# Altium PCB PCB.PcbDoc
Units mil, origin at the board's own origin, x right, y up, seen from the top; angles counter-clockwise.
Board outline 4840 x 4500 mil, 2 copper layers (Top Layer, Bottom Layer); 41 components, 31 nets, 177 pads, 0 vias.
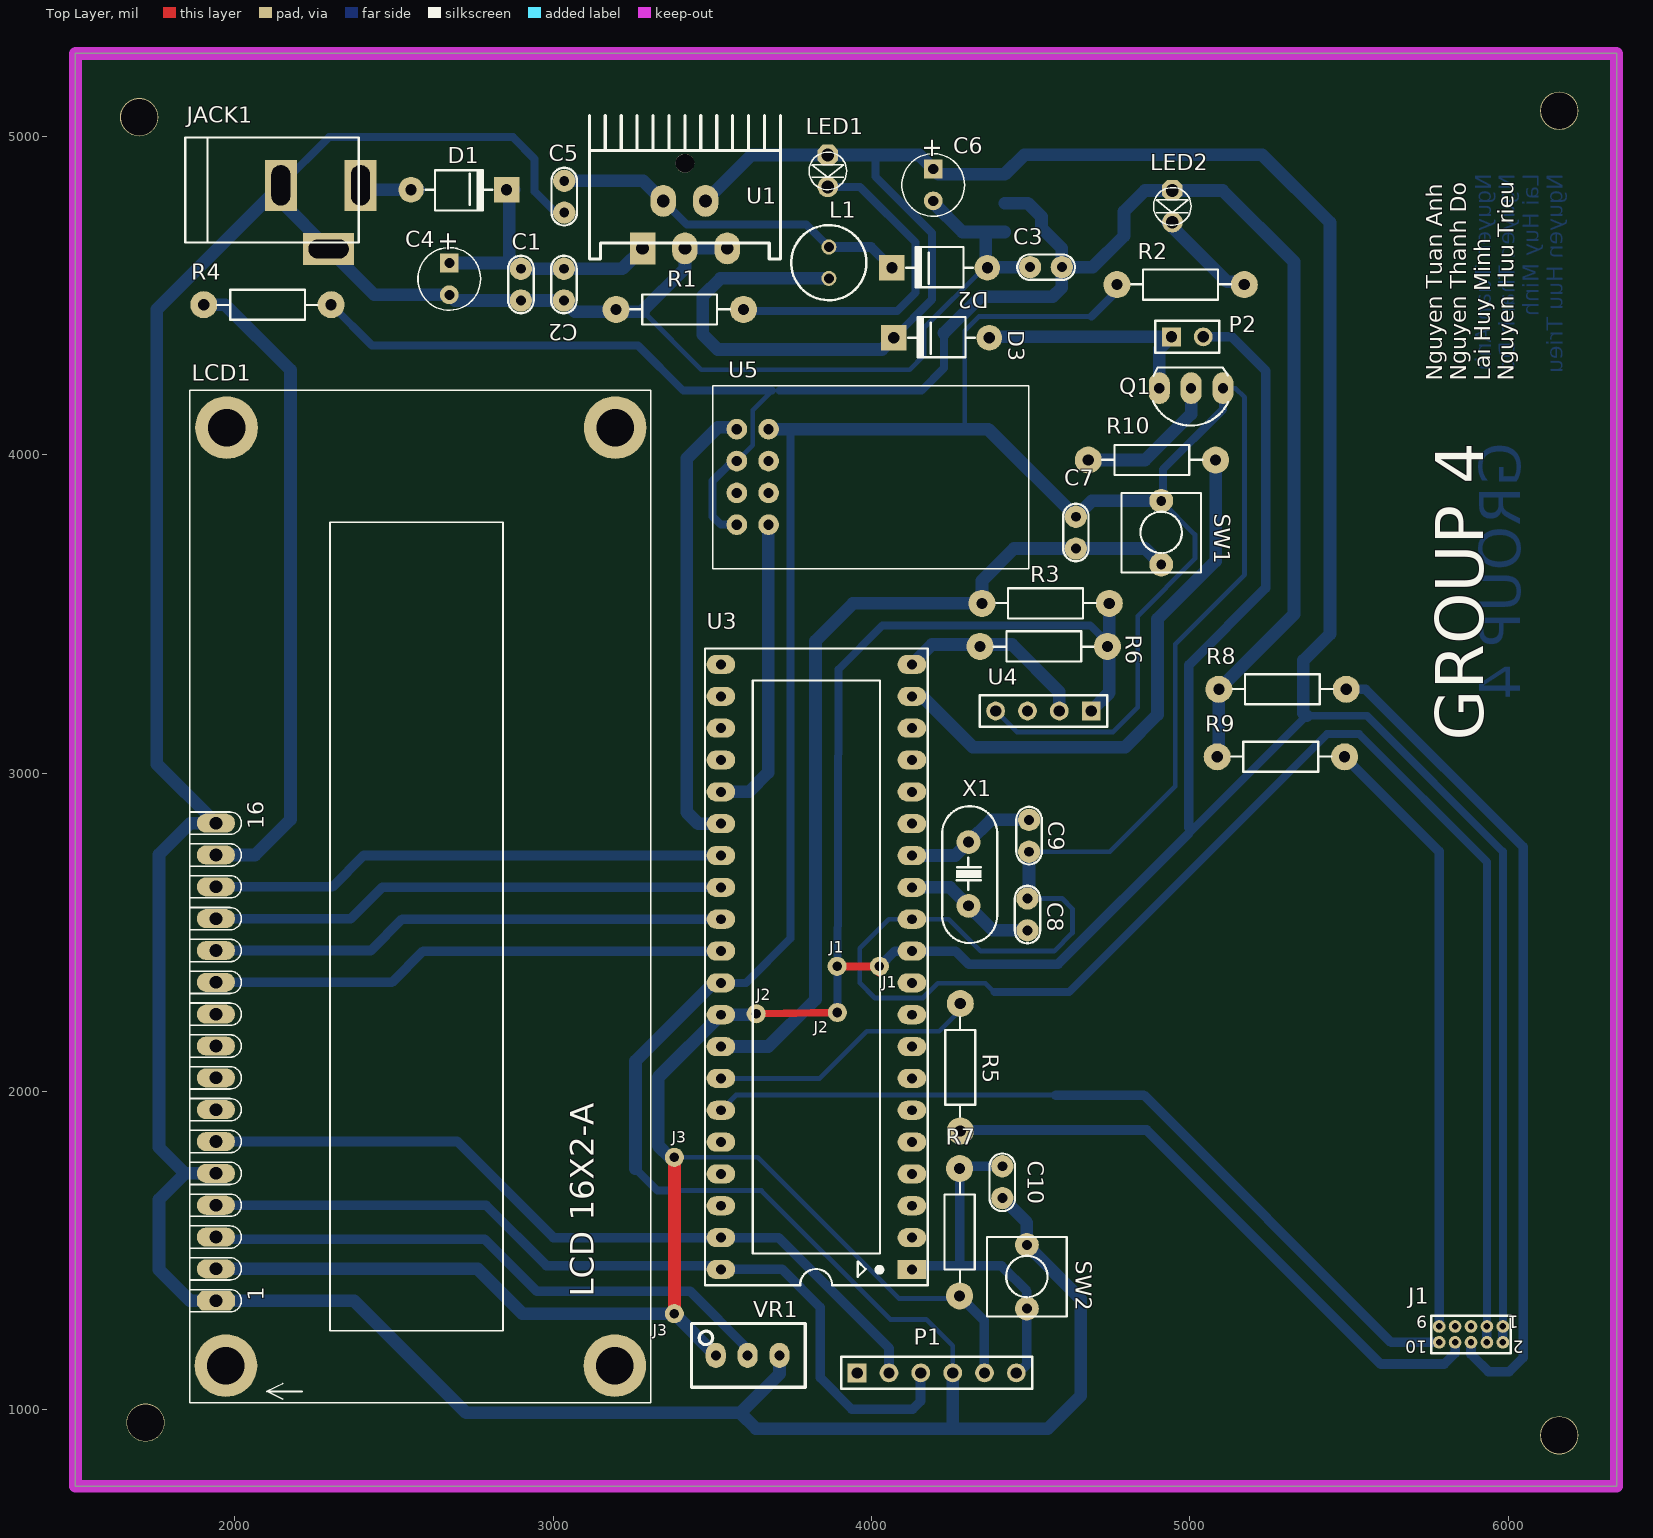
[diagram p0: Top Layer view]
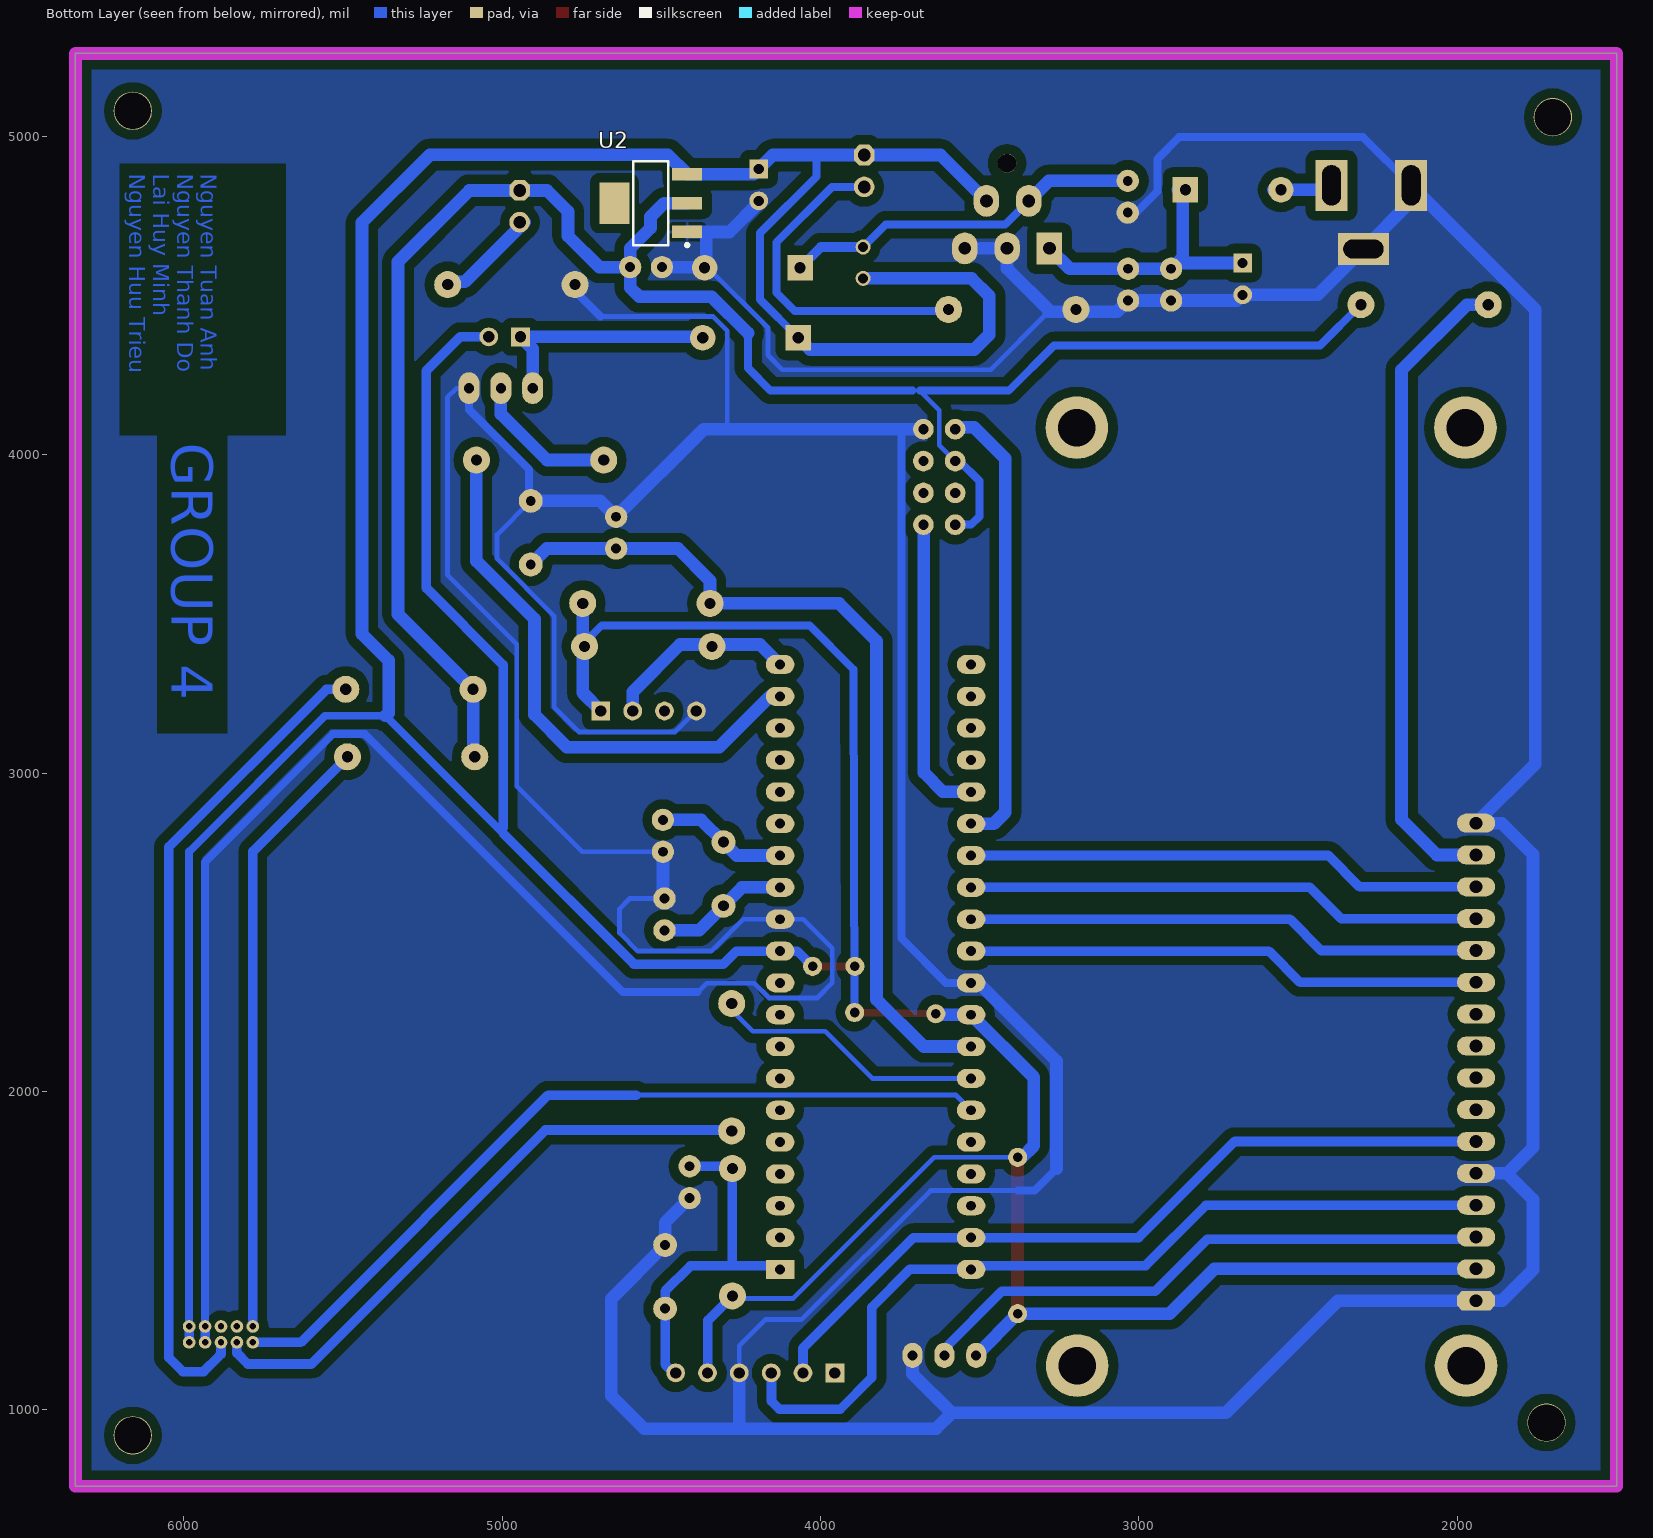
[diagram p1: Bottom Layer view, seen from below]

## Layer stack, top to bottom
Top Solder: solder mask 0.4, Solder Resist, Dk 3.5
Top Layer: signal copper 1.4
Dielectric 1: dielectric 12.6, FR-4, Dk 4.8
Bottom Layer: signal copper 1.4
Bottom Solder: solder mask 0.4, Solder Resist, Dk 3.5

## Board outline
1500,760 6340,760 6340,5260 1500,5260

## Design rules (kind name [scope] priority, off if disabled: settings)
Clearance Clearance_5 [InNamedPolygon('GND')] p1: gap=30 ignorepadtopadclearanceinfootprint=FALSE
Clearance Clearance_4 [InNamedPolygon('GND')] p2: gap=25 ignorepadtopadclearanceinfootprint=FALSE
Clearance Clearance_3 [InNamedPolygon('GND')] p3: gap=10 ignorepadtopadclearanceinfootprint=FALSE except(0: Arc-Hole Track-Hole SMDPad-Hole THPad-Hole Via-Hole Fill-Hole Poly-Hole Region-Hole Text-Hole)
Clearance Clearance_2 [InNamedPolygon('GND')] p4: gap=20 ignorepadtopadclearanceinfootprint=FALSE
Clearance Clearance_1 [InNamedPolygon('GND')] p5: gap=10 ignorepadtopadclearanceinfootprint=FALSE except(0: Arc-Hole Track-Hole SMDPad-Hole THPad-Hole Via-Hole Fill-Hole Poly-Hole Region-Hole Text-Hole)
Clearance [All] p6: gap=10 ignorepadtopadclearanceinfootprint=FALSE
ComponentClearance [All] p1: gap=20 collisioncheckmode=3 verticalgap=20 showdistances=FALSE
PolygonConnect PolygonConnect_1 [All vs IsNamedPolygon('GND')] p1: thpad.connectstyle=Direct thpad.reliefconductorwidth=10 thpad.reliefentries=4 thpad.polygonreliefangle="90 Angle" thpad.airgapwidth=10 smdpad.connectstyle=Relief smdpad.reliefconductorwidth=10 smdpad.reliefentries=4 smdpad.polygonreliefangle="90 Angle" smdpad.airgapwidth=10 via.connectstyle=Relief via.reliefconductorwidth=10 via.reliefentries=4 via.polygonreliefangle="90 Angle" via.airgapwidth=10
PolygonConnect [All] p2: connectstyle=Relief reliefconductorwidth=10 reliefentries=4 polygonreliefangle="90 Angle" airgapwidth=10
RoutingVias [All] p1: holewidth=28 width=50 viastyle="Through Hole" minholewidth=28 minwidth=50 maxholewidth=28 maxwidth=50
SolderMaskExpansion [All] p1: expansion=4
Width [All] p1: maxlimit=40 minlimit=15 preferedwidth=25
29 further rules are at their usual default settings.

## Components (designator, comment, footprint, x,y, rotation, side; value= is the part's Value field where it differs from the comment)
C1 "105" CN1 2899,4484 r90 top value=100pF
C2 "104" CN1 3034,4484 r90 top value=100pF
C3 "100uF" CN1 4498,4589 r0 top value=100pF
C4 "470uF" CA-ALU-5L 2674,4552 r270 top value=104
C5 "105" CN1 3035,4760 r90 top value=100pF
C6 "330uF" CA-ALU-5L 4194,4847 r270 top value=104
C7 "100pF" CN1 4642,3705 r90 top
C8 "20pF" CN1 4490,2606 r270 top value=100pF
C9 "20pF" CN1 4495,2753 r90 top value=100pF
C10 "100pF" CN1 4411,1765 r270 top
D1 "Diode" DIO-1A-SMALL 2504,4832 r180 top value=1N5007
D2 "FR207" DIO-1A-SMALL 4414,4587 r0 top value=1N5007
D3 "Diode" DIO-1A-SMALL 4420,4367 r0 top value=1N5007
J1 "PM 2.5" 62201021821 5883,1237 r180 top
JACK1 "JACK DC" "JACK DC" 2270,4746 r0 top value="Jac DC"
L1 "200uF" L-DIP-M-5.3 3866,4603 r270 top value="150 mH"
LCD1 "LCD 16x2" "LCD 16x2-A" 1941.05,1342.74 r90 top locked
LED1 "LED" LED-3MM-YELLOW 3863,4941 r270 top value="LED 3 ly Single Colour"
LED2 "LED" LED-3MM-YELLOW 4945,4830 r270 top value="LED 3 ly Single Colour"
P1 "Header 6" HDR1X6 3955,1116 r0 top
P2 "Header 2H" HDR1X2 4942,4370 r0 top
Q1 "2N222" TO92-123 5004,4208.84 r180 top value=C1815
R1 "330R" RES-1/4W 3383,4461 r180 top
R2 "100R" RES-1/4W 4956,4539 r180 top
R3 "10k" RES-1/4W 4532,3538 r180 top
R4 "100R" RES-1/4W 2118,4466 r0 top
R5 "1k" RES-1/4W 4274,2061 r270 top
R6 "4.7k" RES-1/4W 4556,3393 r0 top
R7 "10k" RES-1/4W 4282,1573 r90 top
R8 "1k" RES-1/4W 5276,3268 r180 top
R9 "1k" RES-1/4W 5271,3056 r180 top
R10 "10k" RES-1/4W 4866,3988 r180 top
SW1 "SW" SW2 4910,3855 r270 top value="SW chip 2 pin"
SW2 "SW" SW2 4488,1518 r270 top value="SW chip 2 pin"
U1 "LM2576" DIP5-T 3413,4815 r0 top
U2 "LM1117-3.3V" SOT223 4533,4790 r90 bottom
U3 "PIC16F887-PU" DIP40/W0.6 4127,1441 r90 top locked
U4 "DHT11" DHT11 4690,3195 r180 top
U5 "ESP-01" ESP8266 3634,3932.01 r90 top locked
VR1 "10K" RVAR 3611,1171 r0 top value="VR 10K"
X1 "20MHz" XT2 4305,2683 r270 top value=4Mhz

## Footprints (in the part's own frame and the unit in brackets; to place one, negate y for a bottom-side part, rotate by r counter-clockwise, add the part's x,y. Pads: shape width x height; smd on the part's side, far side on the other; paste and mask are expansions set on the pad)
62201021821 [mil] "Socket Header, Pitch 1.27 mm, THT, Vertical, dual row, 10p"
  round 40 hole 20: 1(-100,-25) 2(-100,25) 3(-50,-25) 4(-50,25) 5(0,-25) 6(0,25) 7(50,-25) 8(50,25) 9(100,-25) 10(100,25)
  silkscreen extent -125,-59 125,59, body extent -133,-59 133,59, height 179
CA-ALU-5L [mm] "Polarized capacitors, Aluminum Electrolytic Capacitors, 2-Leads, Body 5x11x2x0.5"
  rect 1.5x1.5 hole 0.8: 1(-1.27,0)
  round 1.5 hole 0.8: 2(1.27,0)
  silkscreen extent -2.5,-2.5 2.5,2.5, body extent -2.54,-2.54 2.54,2.54, height 13.9
CN1 [mil]
  round 70 hole 31: 1(0,0) 2(100,0)
  silkscreen extent -40,-40 141,40, body extent -60,-30 170,37, height 265
DHT11 [mm]
  rect 1.5x1.5 hole 0.9: 1(0,0)
  round 1.5 hole 0.9: 2(2.54,0) 3(5.08,0) 4(7.62,0)
  silkscreen extent -1.27,-1.27 8.89,1.27, body extent -2.19,-2.83 9.81,2.67, height 23.25
DIO-1A-SMALL [mil] "Diode 1A, W 100mil, L 350mil"
  round 80 hole 35: 1(-50,0)
  rect 80x80 hole 35: 2(-350,0)
  silkscreen extent -305,-61 -95,65, body extent -366,-61 -34,65, height 122
DIP5-T [mil]
  rect 80x100 hole 40: 1(-132,-167.09)
  oval 80x100 hole 40: 2(-67,-18) 3(1,-167) 4(66,-18) 5(134,-167)
  round 59.06 hole 59.06: ""(1,100)
  silkscreen extent -299,-200 301,250, body extent -199,-175 201,150, height 859
DIP40/W0.6 [mil] "40 PIN, W 600mil, Pin to pin 100mil"
  rect 60x90 hole 31: 1(0,0)
  oval 60x90 hole 31: 2(100,0) 3(200,0) 4(300,0) 5(400,0) 6(500,0) 7(600,0) 8(700,0) 9(800,0) 10(900,0) 11(1000,0) 12(1100,0) 13(1200,0) 14(1300,0) 15(1400,0) 16(1500,0) 17(1600,0) 18(1700,0) 19(1800,0) 20(1900,0) 21(1900,600) 22(1800,600) 23(1700,600) 24(1600,600) 25(1500,600) 26(1400,600) 27(1300,600) 28(1200,600) 29(1100,600) 30(1000,600) 31(900,600) 32(800,600) 33(700,600) 34(600,600) 35(500,600) 36(400,600) 37(300,600) 38(200,600) 39(100,600) 40(0,600)
  silkscreen extent -50,-50 1950,650, body extent -82,-10 1982,600, height 224
ESP8266 [mil]
  round 65 hole 32: 1(148,57) 2(48,57) 3(-52,57) 4(-152,57) 5(-152,-43) 6(-52,-43) 7(48,-43) 8(148,-43)
  silkscreen extent -290,-860 285,132, body extent -290,-858 281,118, height 566
HDR1X2 [mm] "Connector; Header; 2 Position"
  rect 1.5x1.5 hole 0.9: 1(0,0)
  round 1.5 hole 0.9: 2(2.54,0)
  silkscreen extent -1.27,-1.27 3.81,1.27, body extent -1.27,-1.27 3.81,1.27, height 7
HDR1X6 [mm] "Connector; Header; 6 Position"
  rect 1.5x1.5 hole 0.9: 1(0,0)
  round 1.5 hole 0.9: 2(2.54,0) 3(5.08,0) 4(7.62,0) 5(10.16,0) 6(12.7,0)
  silkscreen extent -1.27,-1.27 13.97,1.27, body extent -1.27,-1.27 13.97,1.27, height 7
"JACK DC" [mil] "Jac DC input"
  rect 100x160 hole 59.06 slot 125.98 at 90 deg: 1(125,100) 2(-125,100)
  rect 160x100 hole 59.06 slot 125.98 at 0 deg: 3(25,-100)
  silkscreen extent -425,-80 120,250, body extent -410,-105 134,269, height 434
L-DIP-M-5.3 [mm] "THT Inductor, 2-Leads, Body 5.3  mm"
  round 1.2 hole 0.8: 1(-1.25,0) 2(1.25,0)
  silkscreen extent -3,-3 3,3, body extent -2.44,-2.44 2.44,2.45, height 7.6
"LCD 16x2-A" [mil] "Pantalla LCD 16 caracteres x 2 Lineas, conexion superior"
  round 196.85 hole 118.11: 0(-203.74,-1252.95) 0(-203.74,-31.5) 0(2742.13,-33.46) 0(2742.13,-1253.94)
  oct 60x120 hole 40: 1(0,0)
  oval 60x120 hole 40: 2(100,0) 3(200,0) 4(300,0) 5(400,0) 6(500,0) 7(600,0) 8(700,0) 9(800,0) 10(900,0) 11(1000,0) 12(1100,0) 13(1200,0) 14(1300,0) 15(1400,0) 16(1500,0)
  silkscreen extent -320,-1365 2859,82, body extent -315,-1357 2854,80, height 753
LED-3MM-YELLOW [mil]
  oct 65x65 hole 40: 1(0,0)
  round 65 hole 40: 2(100,0)
  silkscreen extent -9,-59 109,59, body extent -27,-77 117,80, height 181
RES-1/4W [mil]
  round 85 hole 35: 1(-215,5) 2(185,5)
  silkscreen extent -173,-42 141,52, body extent -227,-42 197,52, height 95
RVAR [mm] "Bien tro vi chinh"
  oval 1.6x2 hole 0.8: 1(-2.54,0) 2(0,0) 3(2.54,0)
  silkscreen extent -4.47,-2.54 4.6,2.54, body extent -4.54,-2.4 4.66,2.4, height 12.02
SOT223 [mm]
  rect 1x2.4 smd: 1(-2.3,-2.9) 2(0,-2.9) 3(2.3,-2.9)
  rect 3.3x2.4 smd: 4(0,2.9)
  silkscreen extent -3.47,-3.02 3.35,1.4, body extent -3.25,-3.56 3.25,3.4, height 1.68
SW2 [mil] "SW button 2pin, 250x 250 mil"
  round 75 hole 31: 1(0,0) 2(200,0)
  silkscreen extent -25,-125 225,125, body extent -18,-116 218,128, height 197
TO92-123 [mil] "TO-92"
  oval 66x100 hole 32: 1(-100,0) 2(0,0) 3(100,0)
  silkscreen extent -117,-65 120,118, body extent -109,-66 109,95, height 245
XT2 [mil] "Footpin for Crystal 2 pin"
  round 75 hole 34: 1(-100,0) 2(100,0)
  silkscreen extent -213,-83 217,90, body extent -216,-87 216,90, height 144

## Part data
C1 C2 C3 C5 C7 C8 C9 C10: library part CAP, "Cap np  1pF - 472pF"
C4 C6: library part CN-ALU-DIP, "Capacitor (Semiconductor SIM Model)", LatestRevisionDate=17-Jul-2002, LatestRevisionNote="Re-released for DXP Platform.", PackageReference=C1206, Publisher="Altium Limited"
D1 D3: "Default Diode", Code - JEDEC=DO-214-AB, Published=8-Jun-2000, Publisher="Altium Limited", Revision="July-2002: Re-released for DXP Platform."
D2: library part Diode, "Default Diode", Code - JEDEC=DO-214-AB, Published=8-Jun-2000, Publisher="Altium Limited", Revision="July-2002: Re-released for DXP Platform."
J1: library part 62201021821, "Socket Header WR-PHD, Pitch 1.27 mm, THT, Vertical, dual row, 10 pin", Contact Resistance="20 mOhm", Insulation Resistance=">1000 MOhm", Operating Temperature="-40 to 105 degC", Rated Current="1 A", Working Voltage="100 VAC", ComponentLink1Description=Manufacturer, ComponentLink1URL=http://www.we-online.de, ComponentLink2Description=Datasheet, ComponentLink2URL=http://katalog.we-online.com/em/datasheet/62201021821.pdf, Mounting Technology=THT, Orientation=Vertical, Part Number=62201021821, Pin Number=10, Pitch="1.27 mm", Published Date="Jan. 2018", Publisher="Wurth Elektronik", Row Number=dual
L1: library part L-DIP-1, "Inductor"
LED1 LED2: "LED Single colour Green and Red"
Q1: "NPN 600mW, ECB", =C2383
R1 R2 R3 R4 R5 R6 R7 R8 R9 R10: library part Res, "Res", Manufacturer="Generic Components", Class=Passive, Published=08/06/2000, Publisher="Altium Hobart Technology Centre", SubClass=R
SW1 SW2: library part SW2, "Switch button 2 pin"
U1: Max Input Voltage="12 V", Max Output Current="3 (6.0 peak) A", Max Output Voltage=mV, Temperature Range="-40 to +125 degC", Category=IC-Power, Min Input Voltage=mV, Min Output Voltage=mV, Mounting Technology="Surface Mount", Status=Unreleased, Supply Voltage=mV
U2: library part LM1117, "800mA Low-Dropout Linear Regulator", Creator="Nguyen Ba Bien", Website=http://group3i.net
U3: "Flash-Based, 8-Bit CMOS Microcontroller with nanoWatt Technology, 8K (x14-Bit words) Program Memory, 624 Bytes Data Memory, 35 I/O pins, 40-Pin PDIP, Standard VDD Range, Extended Temperature", Supplier Part Number 1=PIC16F887-E/P-ND, ComponentLink1Description=Datasheet, ComponentLink1URL=http://ww1.microchip.com/downloads/en/DeviceDoc/41291F.pdf, ComponentLink2Description="Packaging Specification", ComponentLink2URL=http://www.microchip.com/stellent/groups/techpub_sg/documents/packagingspec/en012702.pdf, ComponentLink3Description="Microchip.com Home", ComponentLink3URL=http://www.microchip.com/, DatasheetVersion="revF, Apr-2009", LatestRevisionDate=02-Dec-2009, LatestRevisionNote="Updated datasheet to version revF, Apr-2009.", PackageDescription="40-Lead Plastic Dual In-Line (P) - 600 mil Body [PDIP]", PackageReference=PDIP600-P40, PackageVersion="revBB, Aug-2009", Published=29-Jan-2009, Publisher="Altium Limited", Supplier 1=Digi-Key, Supplier 2=Farnell, Supplier Part Number 2=1703423
U5: library part ESP8266-01, "ESP-12 Wi-Fi Module"
VR1: library part "VAR RES"
X1: library part XT2, "Crystal, 32.768 KHz, -40 to 85 degC, 3.2 x 1.5 x 0.9 mm SMD"
P1 P2: LatestRevisionDate=17-Jul-2002, LatestRevisionNote="Re-released for DXP Platform.", Publisher="Altium Limited"

## Free pads (board coordinates)
  round 60 hole 30: 2(3893,2248) 3(3381,1302) 4(3381,1793) 5(3638,2244) 6(4025,2393) 7(3892,2393)
  round 120 hole 115: 8(1700,5060) 8(1720,960) 8(6160,920) 8(6160,5080)

## Nets (pads, with @x,y where several pads share a name; then routed paths per layer and width w, separated by ;. In a path a pad name is that pad's centre, name@x,y a point inside that pad or via, vN(x,y) a via of type N, cw(c..) or ccw(c..) an arc to the next point about the centre after c; other vN are vias at no path point)
+3.3V: C3.2 LED2.1 R4.2 R8.2 R9.2 U2.2 U5.2 U5.4 | length 6152.4
  Bottom Layer w15: U5.2 3627,4030.01 3627,4140 3688,4201
  Bottom Layer w25: R4.2 2431,4343 3267,4343 3409,4201 3688,4201 ; U5.4 3526.99,3780.01 3501,3806 3501,3917 3564.01,3980.01 U5.2 ; 3711,4201 4157,4201 4228,4272 4228,4382
  Bottom Layer w40: 4228,4382 4342,4496 4569,4496 4598,4525 C3.2 ; U2.2 4491,4790 4534,4747 4534,4712 4598,4648 C3.2 ; R9.2 5091,3056 R8.2 5327,3499 5327,4606 5103,4830 4859,4830 4793,4764 4793,4687 4695,4589 C3.2
+5V: C6.1 D3.2 J1.1 J1.2 L1.2 LCD1.2 LED1.1 P1.5 P2.2 pad.2 pad.3 pad.4 pad.5 pad.6 pad.7 R3.1 R6.2 R7.1 U1.4 U2.3 U3.11 U3.32 U4.1 VR1.1 | length 18424.9
  Top Layer w25: pad.5 pad.2 ; pad.7 pad.6
  Top Layer w30: pad.6@4025,2376 pad.6
  Top Layer w40: pad.3 pad.4
  Bottom Layer w15: pad.4@3381,1793.5 3642.5,1793.5 4086,1350 4269,1350 R7.1
  Bottom Layer w25: pad.2 3897,3326 4035,3464 4687,3464 4741,3410 R6.2 ; 4012,4941 4012,4874 4190,4696 4190,4487 D3.2 ; 4997,2829 4997,2811 5366,3180 5556,3180 5983,2753 J1.1
  Bottom Layer w30: pad.6 4073,2441 U3.11 4264,2441 4305,2400 4586,2400 4997,2811 ; R7.1 4354,1281 4354,1117 P1.5 ; 4997,2829 4997,3340 5238,3581 5238,4264 5132,4370 P2.2 ; J1.2 J1.1
  Bottom Layer w40: LCD1.2 2763.26,1442.74 2903.19,1302.81 pad.3 VR1.1 ; pad.4 3367,1793 3330.5,1829.5 3330.5,2044.5 U3.32 pad.5@3634,2241 ; U1.4 3623,4941 LED1.1 4012,4941 4150,4941 C6.1 4210.45,4880.55 U2.3 4480.28,4942 5227,4942 5440,4729 5440,3437 5356.5,3353.5 5356.5,3188.5 5365,3180 5366,3180 ; L1.2 3525.79,4553.79 3470,4498 3470,4377 3517,4330 4033,4330 D3.2 ; U4.1 4747,3252 R3.1
CONTROL: C7.1 R3.2 SW1.2 U3.33 | length 2752.7
  Bottom Layer w40: U3.33 3676,2141 3824,2289 3824,3415 3942,3533 R3.2 4347,3604 4448,3705 C7.1 4860,3705 SW1.2
DHT_DATA: R6.1 U3.20 U4.2 | length 610.8
  Bottom Layer w40: U3.20 4190,3404 4347,3404 4441,3404 4590,3255 U4.2
ES_RX: U3.25 U5.5 | length 952.7
  Bottom Layer w40: U3.25 3615,2941 3675.5,3001.5 3675.5,3778.51 U5.5
ES_TX: U3.26 U5.1 | length 1433
  Bottom Layer w40: U3.26 3456,2841 3420,2877 3420,3988 3518,4086 3571.01,4086 U5.1
GND: C1.1 C2.1 C3.1 C4.2 C5.1 C6.2 C7.2 C8.1 C9.1 C10.2 D2.1 J1.3 J1.4 JACK1.2 JACK1.3 LCD1.1 LCD1.5 LCD1.16 P1.4 Q1.1 R1.2 R2.2 SW1.1 SW2.1 U1.3 U1.5 U2.1 U3.12 U3.31 U4.4 U5.8 VR1.3 | length 27947.7
  Bottom Layer w15: 3284,4449 3466,4267 4120,4267 4165,4312 4165,4398 4354,4587 D2.1 ; 3380.5,1688.5 3654.5,1688.5 4059,1284 4172,1284 4255,1201 P1.4 ; 4290,4080.01 4293,4083.01 4293,4389 4338,4434 4691,4434 ; 4386,2312 4358,2340 4208.18,2340 4161.68,2293.5 4010.5,2293.5 3963,2341 3963,2450 4054,2541 U3.12 4243,2541 4343,2441 4574,2441 4631,2498 4631,2574 4599,2606 C8.1 ; U4.4 4456,3129 4759,3129 4836,3206 4836,3493 5016,3673 5016,3749 SW1.1 ; C9.1 4749,2753 4954,2958 4954,3405 5172,3623 5172,4180 5143.16,4208.84 Q1.1
  Bottom Layer w25: JACK1.2 2296,4997 2874,4997 2942,4929 2942,4827 3009,4760 C5.1 ; 3259,1757 3327.5,1688.5 3380.5,1688.5 ; U3.31 3606,2341 3745,2480 3745,4080.01 ; 4386,2312 4621,2312 5431,3122 5532,3122 5933,2721 J1.3 ; 4691,4434 4765,4508 R2.2@4765,4543 ; SW1.1 4916,3861 4916,3954 5104,4142 Q1.1
  Bottom Layer w30: J1.4 J1.3
  Bottom Layer w40: LCD1.5 1843.74,1742.74 ; 3259,1757 3259,2096 3504,2341 U3.31 ; 3281,4452 3414,4585 U1.3 U1.5 ; 3284,4449 3069,4449 C2.1 C1.1 2692,4484 C4.2 2439,4502 JACK1.3 2145,4796 JACK1.2 1755,4456 1755,3028.79 LCD1.16 1860.74,2842.74 1762,2744 1762,1824.48 1843.74,1742.74 ; 3588,990 3637,941 4250,941 ; U5.8 3745,4080.01 4290,4080.01 4366.99,4080.01 C7.2 4692,3855 SW1.1 ; VR1.3 3711,1113 3589,991 2727,991 2375.26,1342.74 LCD1.1 1859.26,1342.74 1762,1440 1762,1661 1843.74,1742.74 ; C6.2 4194,4791 4285.55,4699.45 4359,4699.45 ; P1.4 4255,946 4250,941 ; C10.2 4488,1588 SW2.1 4657,1349 4657,1044 4554,941 4250,941 ; U2.1 4359,4699.45 ; C8.1@4485,2613.12 4495,2623.12 C9.1 ; C3.1 4366,4589 D2.1 4359,4592 4359,4699.45
LCD_D4: LCD1.11 U3.30 | length 1626.7
  Bottom Layer w30: LCD1.11 2493.74,2342.74 2592,2441 U3.30
LCD_D5: LCD1.12 U3.29 | length 1626.7
  Bottom Layer w30: LCD1.12 2427.74,2442.74 2526,2541 U3.29
LCD_D6: LCD1.13 U3.28 | length 1626.7
  Bottom Layer w30: LCD1.13 2364.74,2542.74 2463,2641 U3.28
LCD_D7: LCD1.14 U3.27 | length 1626.7
  Bottom Layer w30: LCD1.14 2306.74,2642.74 2405,2741 U3.27
LCD_EN: LCD1.6 P1.2 U3.39 | length 2460.7
  Bottom Layer w30: LCD1.6 2699.26,1842.74 3001,1541 U3.39 3708,1541 4055,1194 P1.2
LCD_RS: LCD1.4 P1.3 U3.40 | length 2707.6
  Bottom Layer w30: LCD1.4 2789.26,1642.74 2979,1453 3515,1453 U3.40 3720,1441 3839,1322 3839,1101 3938,1002 4129,1002 4154,1027 4154,1115 P1.3
LCD_V0: LCD1.3 VR1.2 | length 1836.2
  Bottom Layer w30: LCD1.3 1947.79,1536 2785,1536 2949,1372 3431,1372 3611,1192 VR1.2
MOTOR: R10.1 U3.19 | length 1755.3
  Bottom Layer w40: U3.19 4159,3241 4319,3081 4796,3081 4898.5,3183.5 4898.5,3483.5 5081,3666 R10.1
NetC1_2: C1.2 C2.2 C4.1 D1.2 U1.1 | length 919.3
  Bottom Layer w40: C4.1 2881,4602 C1.2 ; D1.2@2877,4832 2862,4832 2862,4621 C1.2 ; U1.1 3217.09,4584 C2.2 C1.2
NetC5_2: C5.2 D2.2 L1.1 U1.2 | length 1142.1
  Bottom Layer w25: U1.2 3420,4723 3795.21,4723 L1.1
  Bottom Layer w30: L1.1 3998.79,4652.21 D2.2
  Bottom Layer w40: C5.2 3283,4860 U1.2
NetD1_1: D1.1 JACK1.1 | length 187.8
  Bottom Layer w40: JACK1.1 2409,4832 D1.1@2577,4832
NetD3_1: D3.1 P2.1 Q1.3 | length 755.7
  Bottom Layer w40: D3.1@4364,4372 4366,4370 P2.1 4904,4332 Q1.3
NetLCD1_15: LCD1.15 R4.1 | length 2049
  Bottom Layer w40: R4.1 1970,4471 2175,4266 2175,2854 2063.74,2742.74 LCD1.15
NetLED1_2: LED1.2 R1.1 | length 1077
  Bottom Layer w25: R1.1@3599,4433 3617,4451 4081,4451 4139,4509 4139,4666 3964,4841 LED1.2
NetLED2_2: LED2.2 R2.1 | length 312.5
  Bottom Layer w40: LED2.2@4930,4730 5117,4543 R2.1@5165,4543
NetQ1_2: Q1.2 R10.2 | length 463.9
  Bottom Layer w40: R10.2 4859,3983 5004,4128 Q1.2
NetR5_1: R5.1 U3.34 | length 861.6
  Bottom Layer w15: U3.34 3837,2041 3985,2189 4213,2189 4279,2255 R5.1
OSC_IN: C8.2 U3.13 X1.2 | length 416.9
  Bottom Layer w40: U3.13 4247,2641 X1.2 4382,2506 4477.88,2506 C8.2@4485,2513.12
OSC_OUT: C9.2 U3.14 X1.1 | length 414.4
  Bottom Layer w40: U3.14 4263,2741 X1.1 4375,2853 C9.2
PM_RST: J1.6 R8.1 | length 2607
  Bottom Layer w15: 5883,1175 5890,1168
  Bottom Layer w30: R8.1 5552,3263 6047,2768 6047,1164 6003,1120 5938,1120 5890,1168 ; 5883,1175 J1.6
PM_RX: J1.8 R5.2 | length 1907.8
  Bottom Layer w30: R5.2 4282,1879 4864,1879 5599,1144 5799,1144 5833,1178 J1.8
PM_SET: J1.9 R9.1 | length 1916
  Bottom Layer w15: R9.1@5482,3051 R9.1
  Bottom Layer w30: R9.1 5783,2754 J1.9
PM_TX: J1.10 U3.35 | length 2597.3
  Bottom Layer w15: U3.35 3574.5,1988.5 4578.5,1988.5
  Bottom Layer w30: 4578.5,1988.5 4855.5,1988.5 5632,1212 J1.10
RESET: C10.1 P1.6 R7.2 SW2.2 U3.1 | length 1117.8
  Bottom Layer w30: U3.1 4138,1452 4283,1452 ; C10.1 4284,1765 R7.2 4277,1458 4283,1452 ; P1.6 4461,1116 4488,1143 SW2.2 4488,1373 4409,1452 4283,1452
pads on no net: J1.5 J1.7 LCD1.0 LCD1.7 LCD1.8 LCD1.9 LCD1.10 P1.1 U1. U2.4 U3.2 U3.3 U3.4 U3.5 U3.6 U3.7 U3.8 U3.9 U3.10 U3.15 U3.16 U3.17 U3.18 U3.21 U3.22 U3.23 U3.24 U3.36 U3.37 U3.38 U4.3 U5.3 U5.6 U5.7

## Polygon pours and split planes (outlines as drawn)
GND on Bottom Layer "GND" (solid, pour order 2): 1500,5260 6340,5260 6340,760 1500,760

## Keep-outs
Keep-Out Layer:
  lines w40: 1500,760 1500,4900 1500,5100 1500,5260 1880,5260 6340,5260 6340,760 1500,760

## Other copper
Bottom Layer:
  text "Nguyen Tuan Anh / Nguyen Thanh Do / Lai Huy Minh / Nguyen Huu Trieu" at 6171,4883 h50 r90
  text "GROUP 4" at 6038,4037 h130 r90

## Silkscreen, mask and mechanical layers (free items; w line width, h text height)
Top Overlay:
  text "Nguyen Tuan Anh / Nguyen Thanh Do / Lai Huy Minh / Nguyen Huu Trieu" at 6018,4232 h50 r90
  text "GROUP 4" at 5922,3102 h150 r90
  text "J1" at 3868,2435 h35
  text "J1" at 4034,2326 h35
  text "J2" at 3638,2286 h35
  text "J2" at 3818,2184 h35
  text "J3" at 3373,1839 h35
  text "J3" at 3313,1232 h35

## Text inside footprints (layer, text, board x,y; h text height)
C4: Top Overlay "+" at 2644.98,4702.59 h59.06 r270
C6: Top Overlay "+" at 4164.98,4997.59 h59.06 r270
J1: Top Overlay "1" at 6032.8,1296.06 h39.37 r180; Top Overlay "2" at 6048.55,1217.32 h39.37 r180; Top Overlay "9" at 5745.01,1296.06 h39.37 r180; Top Overlay "10" at 5745.01,1217.32 h39.37 r180
LCD1: Top Overlay "1" at 2091.05,1342.74 h50 r90; Top Overlay "16" at 2091.05,2822.74 h50 r90; Top Overlay "LCD 16X2-A" at 3127.07,1354.55 h75 r90